# EAGLE board CT_schematic (EAGLE 7.6.0)

Size 100 x 80 mm. Coordinates in mm from the lower left corner, seen from the top.
Outline: 0,0 100,0 100,80 0,80 0,0
Copper layers (1*16): Top 0.035mm / dielectric 1.5mm / Bottom 0.035mm
Design rules "default": minimum track width 10mil, minimum drill 24mil, track to track 8mil, track to pad 8mil, pad to pad 8mil, via to via 8mil, smd to smd 8mil, copper to edge 40mil, drill to drill 8mil, minimum pad ring 10mil, minimum via ring 8mil, stop-mask expansion 4mil, vias tented up to drill 0mil, thermal gap 10mil

## Footprints (pad centres in the part's own frame; a part is rotated, then mirrored left to right if it is on the bottom)
C0603 = smd 0.8 x 0.8: 1 -0.762,0; 2 0.762,0
C0805 = smd 1.2 x 1.3: 1 -1.016,0; 2 1.016,0
C0402 = smd 0.5 x 0.5: 1 -0.508,0; 2 0.508,0
C1210 = smd 1.2 x 2.5: 1 -1.524,0; 2 1.524,0
C1206 = smd 1.3 x 1.6: 1 -1.524,0; 2 1.524,0
L0603 = smd 0.8 x 0.8: 1 -0.762,0; 2 0.762,0
R0603 = smd 0.8 x 0.8: 1 -0.762,0; 2 0.762,0
UFQFPN28 = smd 0.559 x 0.305: 1 -2.07,1.5; 7 -2.07,-1.5; 15 2.07,-1.5; 21 2.07,1.5 | smd 0.813 x 0.305: 2 -1.943,1; 3 -1.943,0.5; 4 -1.943,0; 5 -1.943,-0.5; 6 -1.943,-1; 16 1.943,-1; 17 1.943,-0.5; 18 1.943,0; 19 1.943,0.5; 20 1.943,1 | smd 0.305 x 0.559: 8 -1.5,-2.07; 14 1.5,-2.07; 22 1.5,2.07; 28 -1.5,2.07 | smd 0.305 x 0.813: 9 -1,-1.943; 10 -0.5,-1.943; 11 0,-1.943; 12 0.5,-1.943; 13 1,-1.943; 23 1,1.943; 24 0.5,1.943; 25 0,1.943; 26 -0.5,1.943; 27 -1,1.943
A2500R24A00GM = smd 1.5 x 0.61: 1 -3,7; 2 -3,6; 3 -3,5; 4 -3,4; 5 -3,3; 6 -3,2; 7 -3,1; 8 -3,0; 17 5.22,0; 18 5.22,1; 19 5.22,2; 20 5.22,3; 21 5.22,4; 22 5.22,5; 23 5.22,6; 24 5.22,7 | smd 0.61 x 1.5: 9 -2.39,-1.6; 10 -1.39,-1.6; 11 -0.39,-1.6; 12 0.61,-1.6; 13 1.61,-1.6; 14 2.61,-1.6; 15 3.61,-1.6; 16 4.61,-1.6 | smd 1 x 1: 25 -2.8,9; 26 -2.8,13; 27 5.02,9; 28 5.02,13; 29 0.11,5.75; 30 2.11,5.75
TSSOP20-I = smd 0.4 x 1.35: 1 -2.925,-2.875; 2 -2.275,-2.875; 3 -1.625,-2.875; 4 -0.975,-2.875; 5 -0.325,-2.875; 6 0.325,-2.875; 7 0.975,-2.875; 8 1.625,-2.875; 9 2.275,-2.875; 10 2.925,-2.875; 11 2.925,2.875; 12 2.275,2.875; 13 1.625,2.875; 14 0.975,2.875; 15 0.325,2.875; 16 -0.325,2.875; 17 -0.975,2.875; 18 -1.625,2.875; 19 -2.275,2.875; 20 -2.925,2.875
HTSS-105-01-G-D = drill 1 pad 1.8 square: 1 0,0 | drill 1 pad 1.8: 2 0,2.54; 3 2.54,0; 4 2.54,2.54; 5 5.08,0; 6 5.08,2.54; 7 7.62,0; 8 7.62,2.54; 9 10.16,0; 10 10.16,2.54
ASEK = smd 1.4 x 1: 1 -1.1,-0.8; 2 1.1,-0.8; 3 1.1,0.8; 4 -1.1,0.8
ASFL1 = smd 1.7 x 1.5: 1 -1.27,-1.1; 2 1.27,-1.1; 3 1.27,1.1; 4 -1.27,1.1
SOIC-8_EP = smd 1.6 x 0.533: 1 -2.921,1.905; 2 -2.921,0.635; 3 -2.921,-0.635; 4 -2.921,-1.905; 5 2.921,-1.905; 6 2.921,-0.635; 7 2.921,0.635; 8 2.921,1.905 | smd 2.54 x 3.302: EPAD 0,0 | drill 0.406 pad 0.406: P$1 -0.508,0.635; P$2 0.381,0.635; P$3 -0.508,-0.635; P$4 0.381,-0.635
DFN8_2X3MC = smd 0.813 x 0.305: 1 -1.398,0.75; 2 -1.398,0.25; 3 -1.398,-0.25; 4 -1.398,-0.75; 5 1.398,-0.75; 6 1.398,-0.25; 7 1.398,0.25; 8 1.398,0.75 | smd 1.753 x 1.549: 9 0,0
JST-2-SMD = smd 1 x 4.6: 1 -1,-3.7; 2 1,-3.7 | smd 1.6 x 3.4: NC1 -3.4,1.5; NC2 3.4,1.5
FCI_10118193-0001LF = smd 0.4 x 1.35: 1 -1.3,2.675; 2 -0.65,2.675; 3 0,2.675; 4 0.65,2.675; 5 1.3,2.675 | smd 1.6 x 1.4: 6 -3.2,2.45; 7 3.2,2.45 | smd 1.9 x 1.9: 8 -1.2,0; 9 1.2,0 | hole 0.5: -3.3,0; 3.3,0
SON-6 = smd 0.55 x 0.3: 1 -0.355,0.5 | smd 0.52 x 0.3: 2 -0.37,0; 3 -0.37,-0.5; 4 0.37,-0.5; 5 0.37,0; 6 0.37,0.5
SW_4-1437565-2 = smd 1.4 x 2.1: 1 -2.23,4.55; 2 -2.23,-4.55; 3 2.23,4.55; 4 2.23,-4.55
LGM67K-G1J2-24-Z = smd 0.8 x 1.4: A -2,0; C 0,0
NC7SZ125M5X = smd 1.3 x 0.7: 1 -1.3,0.95; 2 -1.3,0; 3 -1.3,-0.95; 4 1.3,-0.95; 5 1.3,0.95

## Placement (x,y rotation side)
C1  1e-07  [C0603]  -48.26,62.23 0 top  (outside the outline)
C2  1e-07  [C0603]  -52.07,62.23 0 top  (outside the outline)
C3  1e-07  [C0603]  -55.88,62.23 0 top  (outside the outline)
C4  1e-07  [C0603]  -59.69,62.23 0 top  (outside the outline)
C5  4.7e-06  [C0603]  -44.45,62.23 0 top  (outside the outline)
C6  1e-08  [C0603]  -63.5,62.23 0 top  (outside the outline)
C7  1e-06  [C0603]  -15.24,67.31 0 top  (outside the outline)
C8  1e-05  [C0805]  -50.8,55.88 0 top  (outside the outline)
C9  1e-07  [C0402]  -45.72,67.31 0 top  (outside the outline)
C10  1e-07  [C0402]  -49.53,67.31 0 top  (outside the outline)
C11  1e-07  [C0402]  -53.34,67.31 0 top  (outside the outline)
C12  1e-07  [C0402]  -57.15,67.31 0 top  (outside the outline)
C13  1e-07  [C0402]  -60.96,67.31 0 top  (outside the outline)
C14  1e-07  [C0402]  -64.77,67.31 0 top  (outside the outline)
C15  1e-08  [C0402]  -15.24,72.39 0 top  (outside the outline)
C16  1e-08  [C0402]  -19.05,72.39 0 top  (outside the outline)
C17  1e-05  [C1210]  -38.1,49.53 0 top  (outside the outline)
C18  1e-05  [C1210]  -44.45,49.53 0 top  (outside the outline)
C19  1e-05  [C1210]  -50.8,49.53 0 top  (outside the outline)
C20  1e-05  [C1210]  -57.15,49.53 0 top  (outside the outline)
C21  1e-07  [C0402]  -22.86,72.39 0 top  (outside the outline)
C22  1e-05  [C1206]  -33.02,57.15 0 top  (outside the outline)
C23  1e-05  [C1206]  -39.37,57.15 0 top  (outside the outline)
C24  1e-08  [C0402]  -26.67,72.39 0 top  (outside the outline)
F1  240.0  [L0603]  -19.05,67.31 0 top  (outside the outline)
R1  10000.0  [R0603]  -20.32,62.23 0 top  (outside the outline)
R2  1000.0  [R0603]  -22.86,67.31 0 top  (outside the outline)
R3  1600.5  [R0603]  -26.67,67.31 0 top  (outside the outline)
R4  4700.0  [R0603]  -30.48,67.31 0 top  (outside the outline)
R5  10000.0  [R0603]  -25.4,62.23 0 top  (outside the outline)
R6  4031.5447154472  [R0603]  -59.69,55.88 0 top  (outside the outline)
R7  2200.0  [R0603]  -34.29,67.31 0 top  (outside the outline)
R8  10000.0  [R0603]  -30.48,62.23 0 top  (outside the outline)
R9  10000.0  [R0603]  -35.56,62.23 0 top  (outside the outline)
R10  9100.0  [R0603]  -38.1,67.31 0 top  (outside the outline)
R11  680000.0  [R0603]  -64.77,55.88 0 top  (outside the outline)
R12  120000.0  [R0603]  -15.24,62.23 0 top  (outside the outline)
R13  2000.0  [R0603]  -41.91,67.31 0 top  (outside the outline)
R14  10000.0  [R0603]  -40.64,62.23 0 top  (outside the outline)
U1  STM32L021G4U6  [UFQFPN28]  -25.4,57.15 0 top  (outside the outline)
U2  A2500R24A00GM  [A2500R24A00GM]  -27.94,7.62 0 top  (outside the outline)
U3  SP3203ECY-L/TR  [TSSOP20-I]  -24.13,31.75 0 top  (outside the outline)
U4  HTSS-105-01-G-D  [HTSS-105-01-G-D]  -58.42,29.21 0 top  (outside the outline)
U5  ASEK-32.768KHz-ECST  [ASEK]  -57.15,41.91 0 top  (outside the outline)
U6  ASFL1-12MHZ-NCS  [ASFL1]  -26.67,41.91 0 top  (outside the outline)
U7  MIC5234YME  [SOIC-8_EP]  -17.78,49.53 0 top  (outside the outline)
U8  MCP73831T-2ACI/MC  [DFN8_2X3MC]  -35.56,71.12 0 top  (outside the outline)
U9  S2B-PH-SM4-TB(LF)(SN)  [JST-2-SMD]  -38.1,31.75 0 top  (outside the outline)
U10  10118193-0001LF  [FCI_10118193-0001LF]  -35.56,40.64 0 top  (outside the outline)
U11  TPS3895ADRYR  [SON-6]  -29.21,71.12 0 top  (outside the outline)
U12  4-1437565-2  [SW_4-1437565-2]  -48.26,6.35 0 top  (outside the outline)
U13  Q65110A2395  [LGM67K-G1J2-24-Z]  -26.67,49.53 0 top  (outside the outline)
U14  nc7sz125m5x  [NC7SZ125M5X]  -44.45,55.88 0 top  (outside the outline)

## Library data of the parts
C1-C24 F1 R1-R14 U1-U14 = circuit_tree

## Nets
CLK_U1_2: U1.2 U5.3
CLK_U1_6: U1.6 U6.3
GND: C1.2 C2.2 C3.2 C4.2 C5.2 C6.2 C7.2 C8.2 C9.2 C10.2 C13.2 C14.2 C15.2 C16.2 C17.2 C18.2 C19.2 C20.2 C21.2 C22.2 C23.2 C24.2 R2.2 R5.2 R7.2 R10.2 R12.2 R13.2 U1.16 U2.8 U2.17 U3.18 U4.9 U5.2 U6.2 U7.7 U7.EPAD U8.6 U8.9 U9.2 U10.5 U10.6 U10.7 U10.8 U10.9 U11.2 U13.C U14.1 U14.3
INPUT_USBPOWER_5V: C22.1 R14.2 U8.1 U8.2 U10.1
NET_U1_1: R5.1 U1.1
NET_U1_4: R4.1 U1.4 U14.4
NET_U1_5: C6.1 C7.1 F1.1 U1.5
NET_U1_27: R3.1 U1.27 U13.A
NET_U1_28: R1.1 U1.28 U12.3 U12.4
NET_U3_1: C11.1 U3.1
NET_U3_2: C13.1 U3.2
NET_U3_3: C11.2 U3.3
NET_U3_4: C12.1 U3.4
NET_U3_5: C12.2 U3.5
NET_U3_6: C14.1 U3.6
NET_U3_20: U3.20
NET_U4_3: U3.14 U4.3
NET_U4_4: U3.13 U4.4
NET_U4_5: U3.17 U4.5
NET_U4_6: U3.16 U4.6
NET_U7_4: R6.2 R7.1 U7.4
NET_U8_5: R14.1 U8.5
NET_U8_8: R13.1 U8.8
NET_U11_1: R9.1 R10.1 U11.1
NET_U11_3: R11.2 R12.1 U11.3
NET_U11_4: R8.1 U11.4 U14.2
NET_U12_1: R2.1 U12.1 U12.2
PROC_LPUART1_CTS: U1.12 U3.8
PROC_LPUART1_RTS: U1.15 U3.10
PROC_LPUART1_RX: U1.9 U3.11
PROC_LPUART1_TX: U1.7 U3.7
PROC_SPI1_MISO: U1.14 U2.10
PROC_SPI1_MOSI: U1.13 U2.11
PROC_SPI1_NSS: U1.10 U2.12
PROC_SPI1_SCK: U1.11 U2.9
VCC_S1_3V7: C17.1 C18.1 C23.1 U7.5 U7.8 U8.3 U8.4 U9.1
VCC_TIER1_3V3: C1.1 C2.1 C3.1 C4.1 C5.1 C8.1 C9.1 C10.1 C15.1 C16.1 C19.1 C20.1 C21.1 C24.1 F1.2 R1.2 R3.2 R4.2 R6.1 R8.2 R9.2 R11.1 U1.17 U2.18 U3.12 U3.19 U5.4 U6.4 U7.1 U11.6 U14.5

## Tracks (layer width: path | path; a pad name or v marks a point on that pad's centre or on a via)
CLK_U1_2  (1 unrouted)
CLK_U1_6  (1 unrouted)
GND  (48 unrouted)
INPUT_USBPOWER_5V  (4 unrouted)
NET_U1_1  (1 unrouted)
NET_U1_4  (2 unrouted)
NET_U1_5  (3 unrouted)
NET_U1_27  (2 unrouted)
NET_U1_28  (3 unrouted)
NET_U3_1  (1 unrouted)
NET_U3_2  (1 unrouted)
NET_U3_3  (1 unrouted)
NET_U3_4  (1 unrouted)
NET_U3_5  (1 unrouted)
NET_U3_6  (1 unrouted)
NET_U4_3  (1 unrouted)
NET_U4_4  (1 unrouted)
NET_U4_5  (1 unrouted)
NET_U4_6  (1 unrouted)
NET_U7_4  (2 unrouted)
NET_U8_5  (1 unrouted)
NET_U8_8  (1 unrouted)
NET_U11_1  (2 unrouted)
NET_U11_3  (2 unrouted)
NET_U11_4  (2 unrouted)
NET_U12_1  (2 unrouted)
PROC_LPUART1_CTS  (1 unrouted)
PROC_LPUART1_RTS  (1 unrouted)
PROC_LPUART1_RX  (1 unrouted)
PROC_LPUART1_TX  (1 unrouted)
PROC_SPI1_MISO  (1 unrouted)
PROC_SPI1_MOSI  (1 unrouted)
PROC_SPI1_NSS  (1 unrouted)
PROC_SPI1_SCK  (1 unrouted)
VCC_S1_3V7  (7 unrouted)
VCC_TIER1_3V3  (30 unrouted)